# Altium PCB 自动控温2.PcbDoc
Units mil, origin at the board's own origin, x right, y up, seen from the top; angles counter-clockwise.
Board outline 6000 x 4000 mil, 2 copper layers (Top Layer, Bottom Layer); 25 components, 103 nets, 194 pads, 62 vias.
Unrouted connection lines stored in the file: 2.
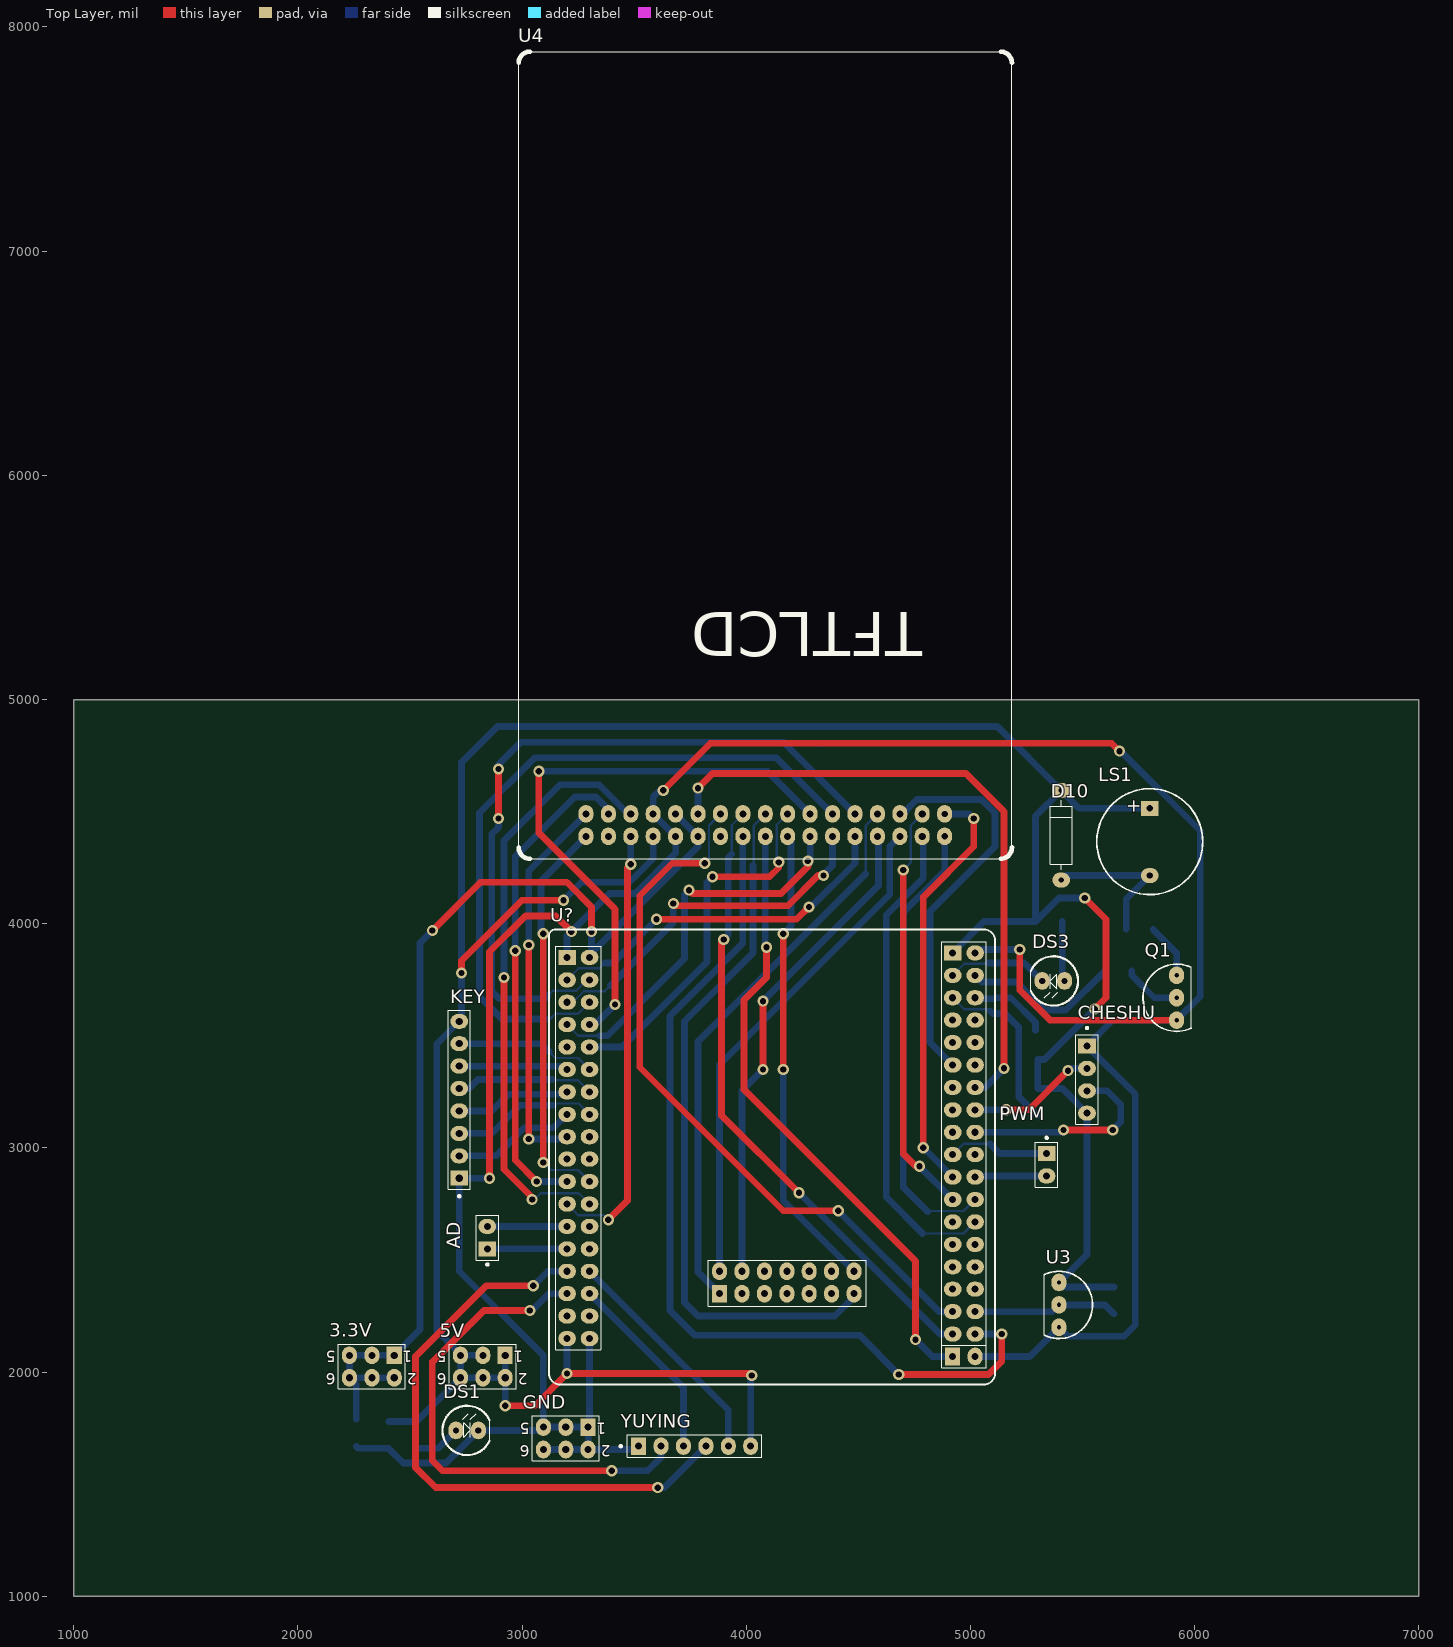
[diagram p0: Top Layer view]
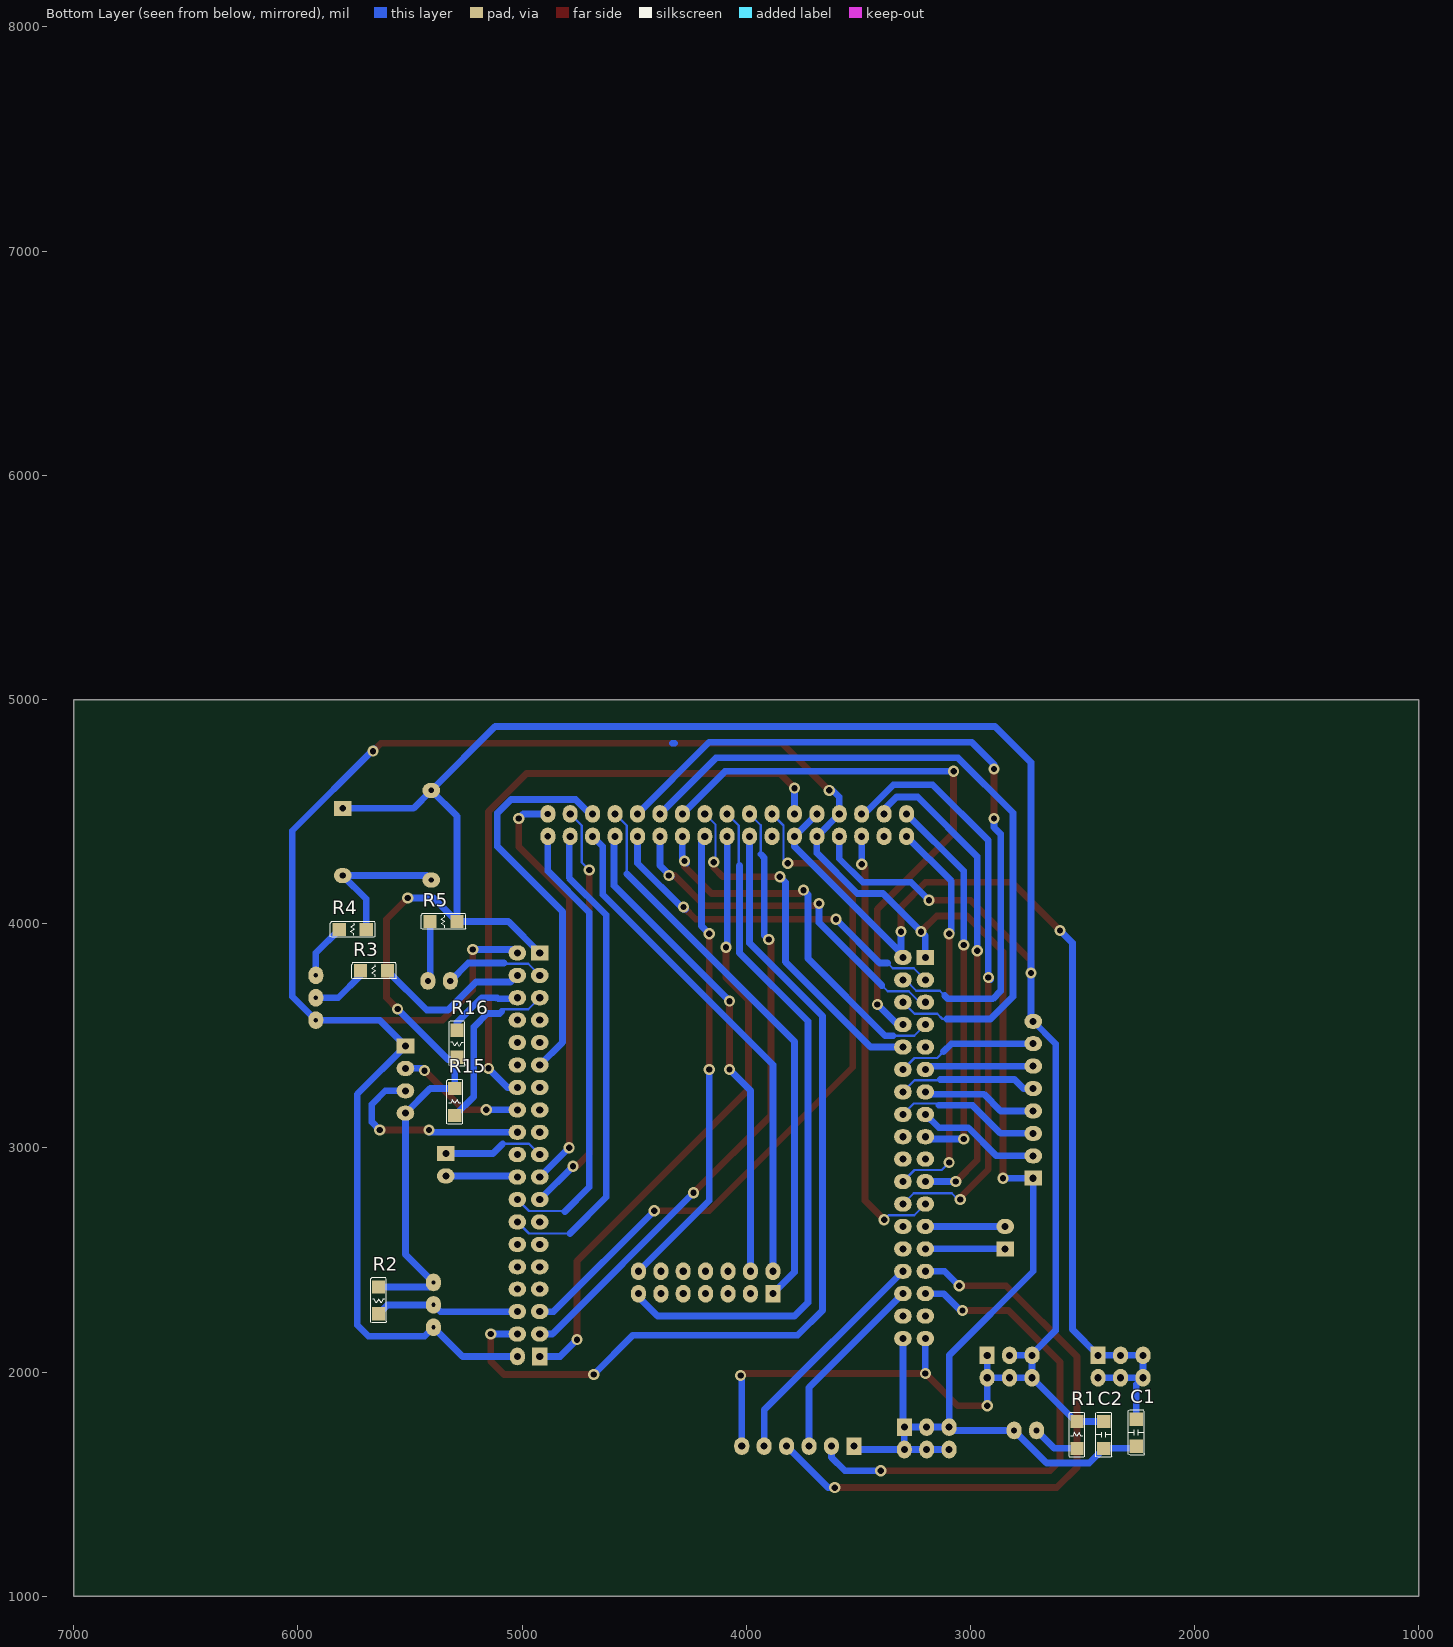
[diagram p1: Bottom Layer view, seen from below]

## Layer stack, top to bottom
Top Layer: signal copper 1.4
Dielectric: dielectric 12.6, FR-4, Dk 4.8
Bottom Layer: signal copper 1.4

## Board outline
1000,1000 7000,1000 7000,5000 1000,5000

## Design rules (kind name [scope] priority, off if disabled: settings)
Clearance [All] p1: gap=10
PolygonConnect [All] p1: connectstyle=Relief reliefconductorwidth=10 reliefentries=4 polygonreliefangle="90 Angle" airgapwidth=10
RoutingVias [All] p1: holewidth=28 width=50 viastyle="Through Hole" minholewidth=28 minwidth=50 maxholewidth=28 maxwidth=50
SolderMaskExpansion [All] p1: expansion=4
Width [All] p1: maxlimit=80 minlimit=30 preferedwidth=50
28 further rules are at their usual default settings.

## Components (designator, comment, footprint, x,y, rotation, side; value= is the part's Value field where it differs from the comment)
3.3V "Header 2X3" HDR2-3 2430,2075 r180 top
5V "Header 2X3" HDR2-3 2925,2075 r180 top
AD "HD-2" HDR1-2 2845,2550 r180 top
C1 "CAP" CC1005-0402 2260,1790 r270 bottom
C2 "CAP" CC1005-0402 2405,1780 r270 bottom
CHESHU "H-4" HDR1-4 5520,3455 r0 top
D10 "Diode" 1n4148 5405,4395 r90 top
DS1 "LED" LED0.1-0.22 2755,1740 r0 top
DS3 "LED" LED0.1-0.22 5370,3745 r180 top
GND "Header 2X3" HDR2-3 3295,1755 r180 top
KEY "HEAD8" HDR1-8 2720,2865 r180 top
LS1 "Bell" BELL0.3-0.46 5800,4365 r90 top
PWM "H-2" H-2/2-T 5340,2975 r0 top
Q1 "NPN(9013)" BCY-3 5920,3670 r0 top
R1 "Res" R2012-0805 2525,1660 r90 bottom
R2 "Res" R2012-0805 5640,2380 r270 bottom
R3 "Res" R2012-0805 5600,3790 r0 bottom
R4 "Res" R2012-0805 5695,3975 r0 bottom
R5 "Res" R2012-0805 5290,4010 r0 bottom
R15 "Res" R2012-0805 5300,3145 r90 bottom
R16 "Res" R2012-0805 5290,3525 r270 bottom
U3 "DS18B20" BCY-3 5395,2300 r180 top
U4 "TFTLCD" TFTLCD 4885,4490 r270 top
U? "STM32?" STM32_MIN 4020,3305 r0 top
YUYING "Header 6" HDR1-6 3520,1670 r90 top

## Footprints (in the part's own frame and the unit in brackets; to place one, negate y for a bottom-side part, rotate by r counter-clockwise, add the part's x,y. Pads: shape width x height; smd on the part's side, far side on the other; paste and mask are expansions set on the pad)
1n4148 [mm]
  oval 1.7x2 hole 0.6 unplated: 1(-5.08,0) 2(5.08,0)
  silkscreen extent -3.94,-1.27 3.94,1.27
BCY-3 [mm]
  oval 1.7x2 hole 0.5 unplated: 1(0,2.54) 2(0,0) 3(0,-2.54)
  silkscreen extent -3.81,-3.81 1.65,3.81
BELL0.3-0.46 [mm]
  rect 1.7x2 hole 0.7 unplated: 1(3.81,0)
  oval 1.7x2 hole 0.7 unplated: 2(-3.81,0)
  silkscreen extent -5.97,-6 6.03,6
CC1005-0402 [mm]
  rect 1.5x1.5 smd: 1(0,0) 2(3.048,0)
  silkscreen extent -1.02,-0.89 4.06,0.89
H-2/2-T [mm]
  rect 2x1.7 hole 0.8 unplated: 1(0,0)
  oval 2x1.7 hole 0.8 unplated: 2(0,-2.54)
  silkscreen extent -1.27,-3.81 1.27,1.9
HDR1-2 [mm]
  rect 2x1.7 hole 0.8 unplated: 1(0,0)
  oval 2x1.7 hole 0.8 unplated: 2(0,-2.54)
  silkscreen extent -1.27,-3.81 1.27,1.9
HDR1-4 [mm]
  rect 2x1.7 hole 0.8 unplated: 1(0,0)
  oval 2x1.7 hole 0.8 unplated: 2(0,-2.54) 3(0,-5.08) 4(0,-7.62)
  silkscreen extent -1.27,-8.89 1.27,2.15
HDR1-6 [mm]
  rect 2x1.7 hole 0.8 unplated: 1(0,0)
  oval 2x1.7 hole 0.8 unplated: 2(0,-2.54) 3(0,-5.08) 4(0,-7.62) 5(0,-10.16) 6(0,-12.7)
  silkscreen extent -1.27,-13.97 1.27,2.15
HDR1-8 [mm]
  rect 2x1.7 hole 0.8 unplated: 1(0,0)
  oval 2x1.7 hole 0.8 unplated: 2(0,-2.54) 3(0,-5.08) 4(0,-7.62) 5(0,-10.16) 6(0,-12.7) 7(0,-15.24) 8(0,-17.78)
  silkscreen extent -1.27,-19.05 1.27,2.15
HDR2-3 [mm]
  rect 1.7x2 hole 0.8 unplated: 1(0,0)
  oval 1.7x2 hole 0.8 unplated: 2(0,2.54) 3(2.54,0) 4(2.54,2.54) 5(5.08,0) 6(5.08,2.54)
  silkscreen extent -1.27,-1.27 6.35,3.81
LED0.1-0.22 [mm]
  oval 1.7x2 hole 0.7 unplated: 1(-1.27,0) 2(1.27,0)
  silkscreen extent -2.79,-2.79 2.55,2.79
R2012-0805 [mm]
  rect 1.5x1.5 smd: 1(0,0) 2(3.048,0)
  silkscreen extent -1.02,-0.89 4.06,0.89
STM32_MIN [mm]
  rect 2x1.7 hole 0.8 unplated: 1(-20.803,13.843) 37(22.885,14.351)
  oval 2x1.7 hole 0.8 unplated: 2(-20.803,11.303) 3(-20.803,8.763) 4(-20.803,6.223) 5(-20.803,3.683) 6(-20.803,1.143) 7(-20.803,-1.397) 8(-20.803,-3.937) 9(-20.803,-6.477) 10(-20.803,-9.017) 11(-20.803,-11.557) 12(-20.803,-14.097) 13(-20.803,-16.637) 14(-20.803,-19.177) 15(-20.803,-21.717) 16(-20.803,-24.257) 17(-20.803,-26.797) 18(-20.803,-29.337) 19(-18.263,13.843) 20(-18.263,11.303) 21(-18.263,8.763) 22(-18.263,6.223) 23(-18.263,3.683) 24(-18.263,1.143) 25(-18.263,-1.397) 26(-18.263,-3.937) 27(-18.263,-6.477) 28(-18.263,-9.017) 29(-18.263,-11.557) 30(-18.263,-14.097) 31(-18.263,-16.637) 32(-18.263,-19.177) 33(-18.263,-21.717) 34(-18.263,-24.257) 35(-18.263,-26.797) 36(-18.263,-29.337) 38(22.885,11.811) 39(22.885,9.271) 40(22.885,6.731) 41(22.885,4.191) 42(22.885,1.651) 43(22.885,-0.889) 44(22.885,-3.429) 45(22.885,-5.969) 46(22.885,-8.509) 47(22.885,-11.049) 48(22.885,-13.589) 49(22.885,-16.129) 50(22.885,-18.669) 51(22.885,-21.209) 52(22.885,-23.749) 53(22.885,-26.289) 54(22.885,-28.829) 56(25.425,14.351) 57(25.425,11.811) 58(25.425,9.271) 59(25.425,6.731) 60(25.425,4.191) 61(25.425,1.651) 62(25.425,-0.889) 63(25.425,-3.429) 64(25.425,-5.969) 65(25.425,-8.509) 66(25.425,-11.049) 67(25.425,-13.589) 68(25.425,-16.129) 69(25.425,-18.669) 70(25.425,-21.209) 71(25.425,-23.749) 72(25.425,-26.289) 73(25.425,-28.829)
  rect 1.7x2 hole 0.8 unplated: 55(22.885,-31.369) 82(-3.531,-24.257)
  oval 1.7x2 hole 0.8 unplated: 74(25.425,-31.369) 75(-3.531,-21.717) 76(-0.991,-21.717) 77(1.549,-21.717) 78(4.089,-21.717) 79(6.629,-21.717) 80(9.169,-21.717) 81(11.709,-21.717) 83(-0.991,-24.257) 84(1.549,-24.257) 85(4.089,-24.257) 86(6.629,-24.257) 87(9.169,-24.257) 88(11.709,-24.257)
  silkscreen extent -22.86,-34.54 27.69,17.02
TFTLCD [mm]
  oval 2x1.7 hole 0.712: 1(0,0) 2(2.54,0)
  oval 2x1.7 hole 0.8: 3(0,-2.54) 4(2.54,-2.54) 5(0,-5.08) 6(2.54,-5.08) 7(0,-7.62) 8(2.54,-7.62) 9(0,-10.16) 10(2.54,-10.16) 11(0,-12.7) 12(2.54,-12.7) 13(0,-15.24) 14(2.54,-15.24) 15(0,-17.78) 16(2.54,-17.78) 17(0,-20.32) 18(2.54,-20.32) 19(0,-22.86) 20(2.54,-22.86) 21(0,-25.4) 22(2.54,-25.4) 23(0,-27.94) 24(2.54,-27.94) 25(0,-30.48) 26(2.54,-30.48) 27(0,-33.02) 28(2.54,-33.02) 29(0,-35.56) 30(2.54,-35.56) 31(0,-38.1) 32(2.54,-38.1) 33(0,-40.64) 34(2.54,-40.64)
  silkscreen extent -86.36,-48.26 5.08,7.62

## Part data
3.3V 5V GND: "Header, 3-Pin, Dual row"
AD PWM: "Header, 2-Pin"
C1 C2: "Capacitor"
CHESHU: "Header, 4-Pin"
D10: "Default Diode"
DS1 DS3: "Typical RED, GREEN, YELLOW, AMBER GaAs LED"
KEY: "Connector,8-pin"
LS1: "Electrical Bell"
Q1: "NPN Bipolar Transistor"
R1 R2 R3 R4 R5 R15 R16: "Resistor"
U3: "Programmable Resolution / 1-Wire Digital Thermometer"
U?: library part STM32_MIN
YUYING: "Header, 6-Pin"

## Via types
v1: diameter 50, hole 28, Top Layer to Bottom Layer, 62 vias

## Nets (pads, with @x,y where several pads share a name; then routed paths per layer and width w, separated by ;. In a path a pad name is that pad's centre, name@x,y a point inside that pad or via, vN(x,y) a via of type N, cw(c..) or ccw(c..) an arc to the next point about the centre after c; other vN are vias at no path point)
3.3V: 3.3V.1 3.3V.2 3.3V.3 3.3V.4 3.3V.5 3.3V.6 C1.1 U4.24 U4.25 U?.19 | length 4594.4
  Top Layer w30: v1(2600,3970) 2815,4185 3200,4185 3310,4075 v1(3310,3965)
  Bottom Layer w30: C1.1 2260,1945 3.3V.6 ; 3.3V.2 3.3V.4 3.3V.6 ; v1(2600,3970) 2545,3915 2545,2190 3.3V.1 3.3V.3 3.3V.5 3.3V.6 ; U?.19 3310,3859 U?.19@3310,3870 ; v1(3310,3965) U?.19@3310,3870 ; U4.25 U4.24 3785,4345 U?.19@3310,3870
AD1: 
AD2: 
E1: 
E2: 
E3: 
E4: 
E5: 
E6: 
GND: C1.2 C2.2 CHESHU.1 DS1.2 GND.1 GND.2 GND.3 GND.4 GND.5 GND.6 KEY.1 Q1.3 U3.1 U4.22 U4.26 U4.27 U?.1 U?.36 U?.56 U?.74 YUYING.1 | length 13284.5
  Top Layer w30: v1(2855,2865) 2855,3875 3015,4035 3150,4035 v1(3220,3965) ; v1(3630,4595) 3840,4805 5630,4805 v1(5665,4770) ; v1(5220,3885) 5220,3705 5355,3570 Q1.3
  Bottom Layer w30: C1.2 2270,1660 C2.2 2470,1595 2660,1595 DS1.2 3080,1740 GND.5 ; v1(2855,2865) KEY.1 2720,2450 3095,2075 GND.5 ; GND.6 GND.4 GND.2 ; U?.1 3201,3946 v1(3220,3965) 3390,4135 3505,4135 3685,4315 U4.26 U4.27 3585,4565 v1@3620,4600 ; U?.36 3301,1761 GND.1 ; YUYING.1 3505,1655 GND.2 ; 4320,4805 4330,4805 ; U?.74 5265,2070 U3.1 5435,2160 5685,2160 5735,2210 5735,3240 CHESHU.1 5635,3570 Q1.3 6025,3675 6025,4415 v1@5660,4780 ; U?.56 5030,3870 5045,3885 v1(5220,3885) ; GND.5 GND.3 GND.1 ; GND.2 GND.1
NetD10_1: D10.1 LS1.2 R4.1 | length 686.8
  Bottom Layer w30: D10.1 5425,4215 LS1.2 5695,4110 R4.1
NetDIANLIU_1: 
NetDIANLIU_2: 
NetDS1_1: DS1.1 R1.1 | length 213.1
  Bottom Layer w30: R1.1 2625,1660 DS1.1
NetDS3_1: DS3.1 R5.2 | length 269.1
  Bottom Layer w30: R5.2 5410,3755 DS3.1
NetJIALE_1: 
NetQ1_1: Q1.1 R4.2 | length 248.5
  Bottom Layer w30: R4.2 5920,3870 Q1.1
NetQ1_2: Q1.2 R3.2 | length 261.4
  Bottom Layer w30: R3.2 5720,3770 5820,3670 Q1.2
NetR11_2: 
NetR12_2: 
NetR13_2: 
PA0: U?.31
PA1: AD.2 U?.13 | length 356
  Bottom Layer w30: AD.2 U?.13
PA2: U?.32
PA3: AD.1 U?.14 | length 356
  Bottom Layer w30: AD.1 U?.14
PA4: U?.33 YUYING.5 | length 1036.4
  Bottom Layer w30: U?.33 3920,1831 YUYING.5
PA5: U?.15 YUYING.4 | length 2737.3
  Top Layer w30: v1(3050,2385) 2840,2385 2525,2070 2525,1575 2615,1485 v1(3605,1485)
  Bottom Layer w30: v1(3050,2385) 3115,2450 U?.15 ; v1(3605,1485) 3635,1485 YUYING.4
PA6: U?.34 YUYING.3 | length 853.6
  Bottom Layer w30: U?.34 3720,1931 YUYING.3
PA7: U?.16 YUYING.2 | length 2280.8
  Top Layer w30: v1(3035,2275) 2830,2275 2600,2045 2600,1605 2645,1560 v1(3400,1560)
  Bottom Layer w30: v1(3035,2275) 3045,2275 3120,2350 U?.16 ; v1(3400,1560) 3560,1560 3620,1620 YUYING.2
PA8: PWM.2 U?.66 | length 321.1
  Bottom Layer w30: U?.66 5026,2875 PWM.2
PA9: PWM.1 U?.46 | length 457.1
  Bottom Layer w10: U?.46 4969.46,3018.46 5086.54,3018.46
  Bottom Layer w30: 5086.54,3018.46 5130,2975 PWM.1
PA10: U?.65
PA11: U?.45
PA12: CHESHU.3 U?.64 | length 918.4
  Top Layer w30: v1(5415,3080) v1(5635,3080)
  Bottom Layer w30: U?.64 v1@5415,3070 ; CHESHU.3 5610,3255 5670,3195 5670,3115 v1(5635,3080)
PA13: U?.44
PA14: CHESHU.2 U?.63 | length 575.6
  Top Layer w30: v1(5160,3170) 5260,3170 v1(5435,3345)
  Bottom Layer w30: U?.63 v1(5160,3170) ; v1(5435,3345) 5445,3355 CHESHU.2
PA15: U?.43
PB0: U4.6 U?.75 | length 2273
  Bottom Layer w30: U?.75 3881,3371 4640,4130 4640,4345 U4.6
PB1: U4.7 U?.82 | length 2511.1
  Bottom Layer w10: 4533.46,4223.46 4533.46,4438.46 U4.7
  Bottom Layer w30: U?.82 3785,2446 3785,3475 4533.46,4223.46
PB2: U4.8 U?.76 | length 2194.3
  Top Layer w30: v1(4075,3350) v1(4075,3655)
  Bottom Layer w30: U?.76 3981,3256 v1(4075,3350) ; v1(4075,3655) 4590,4170 4590,4385 U4.8
PB3: U4.9 U?.20 | length 3272.1
  Top Layer w30: v1(2895,4470) v1(2895,4690)
  Bottom Layer w10: 3115,3680 3136.54,3701.54 3241.54,3701.54 3290,3750 U?.20
  Bottom Layer w30: v1(2895,4470) 2895,4430 2865,4400 2865,3700 2900,3665 3100,3665 3115,3680 ; v1(2895,4690) 2895,4710 2995,4810 4165,4810 U4.9
PB4: U4.10 U?.2 | length 1633.5
  Top Layer w30: v1(3600,4020) 4225,4020 v1(4280,4075)
  Bottom Layer w10: U?.2 3252.54,3801.54 3346.54,3801.54 3370,3825
  Bottom Layer w30: 3370,3825 3405,3825 v1(3600,4020) ; v1@4270,4065 4280,4065 4485,4270 U4.10
PB5: U4.11 U?.21 | length 3163.5
  Bottom Layer w10: 3105,3575 3125,3575 3148.46,3598.46 3249.46,3598.46 U?.21
  Bottom Layer w30: 3105,3575 2910,3575 2810,3675 2810,4495 3055,4740 4135,4740 U4.11
PB6: U4.12 U?.3 | length 1641.8
  Top Layer w30: v1@3670,4090 v1(3675,4090) 3685,4080 4185,4080 4320,4215 v1(4345,4215)
  Bottom Layer w10: U?.3 3226.56,3650 3275.02,3698.46 3368.46,3698.46 3395,3725
  Bottom Layer w30: 3395,3725 3675,4005 v1(3675,4090) ; v1@4335,4210 4385,4260 U4.12
PB7: U4.13 U?.22 | length 2630.8
  Top Layer w30: v1(3075,4680) 3075,4405 3415,4065 v1(3415,3640)
  Bottom Layer w30: v1@3065,4680 v1(3075,4680) 4095,4680 U4.13 ; U?.22 3325,3550 v1(3415,3640)
PB8: U4.14 U?.4 | length 1745.1
  Top Layer w30: v1@3740,4150 v1(3745,4150) 3760,4135 4155,4135 4275,4255 v1(4275,4280)
  Bottom Layer w10: U?.4 3251,3500 3345,3500
  Bottom Layer w30: 3345,3500 3380,3500 3725,3845 3725,4130 v1(3745,4150) ; v1@4265,4270 v1(4275,4280) 4285,4290 U4.14
PB9: U4.15 U?.23 | length 1646.9
  Top Layer w30: v1(3850,4210) 4105,4210 4145,4250 v1(4145,4275)
  Bottom Layer w10: v1(4145,4275) 4136.54,4283.46 4136.54,4441.54 U4.15
  Bottom Layer w30: U?.23 3445,3450 3825,3830 3825,4185 v1(3850,4210)
PB10: U4.16 U?.81 | length 2098.7
  Top Layer w30: v1@4160,3960 v1(4165,3955) v1(4165,3350)
  Bottom Layer w30: v1(4165,3350) 4165,2766 U?.81 ; v1(4165,3955) 4200,3990 4200,4375 U4.16
PB11: U4.17 U?.88 | length 3159.6
  Bottom Layer w10: 4030,4260 4033.46,4263.46 4033.46,4438.46 U4.17
  Bottom Layer w30: 4030,4260 4030,3870 3725,3565 3725,2310 3785,2250 4395,2250 4481,2336 U?.88
PB12: U4.18 U?.55 | length 2805.4
  Top Layer w30: v1(4090,3895) 4090,3760 3990,3660 3990,3260 4755,2495 v1(4755,2145) v1@4755,2135
  Bottom Layer w30: v1@4085,3900 U4.18 ; v1(4755,2145) 4830,2070 U?.55
PB13: U4.19 U?.54 | length 2829.2
  Top Layer w30: v1@3900,3940 3890,3930 3890,3145 v1(4235,2800)
  Bottom Layer w10: 3935,4310 3935,4440 U4.19
  Bottom Layer w30: v1(3900,3930) 3920,3950 3920,4295 3935,4310 ; v1(4235,2800) 4865,2170 U?.54
PB14: U4.20 U?.73 | length 4111.5
  Top Layer w30: v1(4680,1990) 5080,1990 5140,2050 v1(5140,2170)
  Bottom Layer w30: U4.20 3985,3913.43 3660,3588.43 3660,2275 3770,2165 4505,2165 v1(4680,1990) ; U?.73 v1(5140,2170)
PB15: U4.21 U?.53 | length 3211.5
  Top Layer w30: v1(3815,4270) 3670,4270 3525,4125 3525,3360 4165,2720 v1(4410,2720)
  Bottom Layer w10: v1(3815,4270) 3833.46,4288.46 3833.46,4438.46 U4.21
  Bottom Layer w30: v1(4410,2720) 4860,2270 U?.53
PC0: U4.34 U?.29 | length 1781.1
  Top Layer w30: v1@3090,2930 v1(3095,2935) v1(3095,3955)
  Bottom Layer w10: v1(3095,2935) 3128.46,2901.54 3249.46,2901.54 U?.29
  Bottom Layer w30: v1@3085,3960 3085,4190 U4.34
PC1: U4.31 U?.11 | length 2197.9
  Top Layer w30: v1(2970,3880) 2970,2945 v1(3065,2850)
  Bottom Layer w30: v1@2970,3875 v1(2970,3880) 2970,4300 3235,4565 3330,4565 3385,4510 U4.31 ; v1(3065,2850) U?.11
PC2: U4.29 U?.30 | length 2674.2
  Top Layer w30: v1(2920,3760) 2920,2905 v1@3050,2775
  Bottom Layer w10: v1(3045,2770) 3055,2770 3083.46,2798.46 3252.54,2798.46 U?.30
  Bottom Layer w30: v1@2910,3750 v1(2920,3760) 2920,4371.57 3168.43,4620 3343.59,4620 3473.59,4490 U4.29
PC3: U4.30 U?.12 | length 1971.5
  Top Layer w30: v1(3385,2680) 3470,2765 3470,4250 v1(3485,4265)
  Bottom Layer w10: U?.12 3251,2700 3365,2700 v1(3385,2680)
  Bottom Layer w30: v1@3480,4260 v1(3485,4265) U4.30
PC4: U?.35
PC5: U?.17
PC6: U4.4 U?.68 | length 2164.7
  Bottom Layer w10: 4786.54,2618.46 4969.46,2618.46 U?.68
  Bottom Layer w30: U4.4 4790,4385 4790,4205 4625,4040 4625,2780 4786.54,2618.46
PC7: U4.3 U?.48 | length 1856.1
  Top Layer w30: v1(4700,4240) 4700,2975 4757,2918 v1(4773,2918)
  Bottom Layer w10: v1(4700,4240) 4733.46,4273.46 4733.46,4438.46 U4.3
  Bottom Layer w30: v1(4773,2918) U?.48
PC8: U4.2 U?.67 | length 2031
  Bottom Layer w10: 4810,2715 4813.46,2718.46 4969.46,2718.46 U?.67
  Bottom Layer w30: 4810,2715 4700,2825 4700,4050 4885,4235 U4.2
PC9: U4.1 U?.47 | length 1885.7
  Top Layer w30: v1(4790,3001) 4790,4120 5015,4345 v1(5015,4470)
  Bottom Layer w30: v1(4790,3001) U?.47 ; U4.1 4995,4490 v1(5015,4470)
PC10: U4.23 U?.62 | length 2876.5
  Top Layer w30: v1(3785,4605) 3850,4670 4980,4670 5150,4500 v1(5150,3355)
  Bottom Layer w30: U4.23 v1@3785,4595 ; U?.62 5065,3270 v1(5150,3355)
PC11: U4.5 U?.42 | length 1762.5
  Bottom Layer w30: U4.5 4696.41,4490 4760.78,4554.37 5049.37,4554.37 5110,4493.74 5110,4345 4820,4055 4820,3471 U?.42
PC12: U?.61
PC13: U4.33 U?.9 | length 1737.8
  Top Layer w30: v1@3025,3035 v1(3030,3040) v1(3030,3905)
  Bottom Layer w30: v1(3030,3040) 3191,3040 U?.9 ; v1(3030,3905) 3030,4235 U4.33
PC14: U?.28
PC15: U?.10
PD0: U?.41
PD1: U?.60
PD2: U?.40
PD3: U?.59
PD4: R15.1 U?.39 | length 778.1
  Bottom Layer w10: U?.39 4972.54,3618.46 5081.54,3618.46 5090,3610
  Bottom Layer w30: 5090,3610 5100,3600 5155,3600 5215,3540 5215,3230 R15.1
PD5: R16.1 U?.58 | length 353.7
  Bottom Layer w30: U?.58 5026,3665 5106.57,3665 5111.57,3670 5180,3670 5290,3560 R16.1
PD6: DS3.2 U?.38 | length 454.9
  Bottom Layer w10: U?.38 4972.54,3821.54 5076.54,3821.54 5080,3825
  Bottom Layer w30: 5080,3825 5240,3825 DS3.2
PD7: R3.1 U?.57 | length 715.7
  Bottom Layer w30: U?.57 5051,3740 5205,3740 5330,3615 5425,3615 R3.1
PD8: R2.2 U3.2 U?.72 | length 648
  Bottom Layer w30: U?.72 5365,2270 U3.2 5600,2300 R2.2
PD9: U?.52
PD10: U?.71
PD11: U?.51
PD12: U?.70
PD13: U?.50
PD14: U?.69
PD15: U?.49
PE0: U?.5
PE1: KEY.7 U?.24 | length 628.6
  Bottom Layer w10: 3120,3430 3148.46,3401.54 3249.46,3401.54 U?.24
  Bottom Layer w30: KEY.7 3085,3465 3120,3430
PE2: KEY.6 U?.6 | length 487.2
  Bottom Layer w30: KEY.6 3186,3365 U?.6
PE3: KEY.5 U?.25 | length 620.4
  Bottom Layer w10: 3135,3305 3138.46,3301.54 3249.46,3301.54 U?.25
  Bottom Layer w30: KEY.5 2763.43,3265 2803.43,3305 3135,3305
PE4: KEY.4 U?.7 | length 516.2
  Bottom Layer w30: KEY.4 2865,3165 2940,3240 3191,3240 U?.7
PE5: KEY.3 U?.26 | length 656.4
  Bottom Layer w10: 3140,3190 3148.46,3198.46 3252.54,3198.46 U?.26
  Bottom Layer w30: KEY.3 2865,3065 2990,3190 3140,3190
PE6: KEY.2 U?.8 | length 557.6
  Bottom Layer w30: KEY.2 2884.29,2965 3009.29,3090 3141,3090 U?.8
PE7: U?.83
PE8: U?.77
PE9: U?.84
PE10: U?.78
PE11: U?.85
PE12: U?.79
PE13: U?.86
PE14: U?.80
PE15: U?.87
VBAT: U?.27
VCC: 5V.1 5V.2 5V.3 5V.4 5V.5 5V.6 C2.1 CHESHU.4 D10.2 KEY.8 LS1.1 R1.2 R2.1 R5.1 R15.2 R16.2 U3.3 U4.28 U?.18 U?.37 YUYING.6 | length 13579.9
  Top Layer w30: v1(2730,3780) 2730,3835 3000,4105 v1(3185,4105) ; v1(2925,1850) 3057,1850 v1(3201,1994) 4016,1994 v1(4025,1985) ; v1(5510,4115) 5605,4020 5605,3670 v1(5555,3620)
  Bottom Layer w30: C2.1 R1.2 2530,1780 5V.6 ; 5V.3 5V.5 ; v1@2920,1845 v1(2925,1850) 5V.2 ; 5V.1 5V.2 ; v1(3185,4105) 3265,4185 3480,4185 3585,4290 U4.28 ; U?.18 v1(3201,1994) v1@3205,1990 ; YUYING.6 v1@4020,1990 ; U?.37 5061,4010 R5.1 ; v1(5510,4115) 5395,4115 R5.1 ; v1(5555,3620) 5330,3395 5300,3395 R15.2 5410,3265 CHESHU.4 5520,2525 U3.3 5415,2380 R2.1 ; LS1.1 5485,4515 D10.2 ; 5V.6 5V.4 5V.2 ; 5V.6 5V.5 ; 5V.5 2725,2080 2620,2185 2620,3465 KEY.8 2730,3575 v1(2730,3780) 2730,4720 2890,4880 5120,4880 D10.2 ; R5.1 5290,4480 D10.2
pads on no net: U4.32

## Text inside footprints (layer, text, board x,y; h text height)
3.3V: Top Overlay "1" at 2510,2095 h50 r180; Top Overlay "2" at 2530,1995 h50 r180; Top Overlay "5" at 2170,2095 h50 r180; Top Overlay "6" at 2170,1995 h50 r180
5V: Top Overlay "1" at 3005,2095 h50 r180; Top Overlay "2" at 3025,1995 h50 r180; Top Overlay "5" at 2665,2095 h50 r180; Top Overlay "6" at 2665,1995 h50 r180
GND: Top Overlay "1" at 3375,1775 h50 r180; Top Overlay "2" at 3395,1675 h50 r180; Top Overlay "5" at 3035,1775 h50 r180; Top Overlay "6" at 3035,1675 h50 r180
LS1: Top Overlay "+" at 5755,4490 h59.06 r90
U?: Top Overlay "５Ｖ" at 5086.39,3546.5 h0; Top Overlay "５Ｖ" at 5279.31,3450.04 h0